# EAGLE board tube-tester.job (EAGLE 6.4)
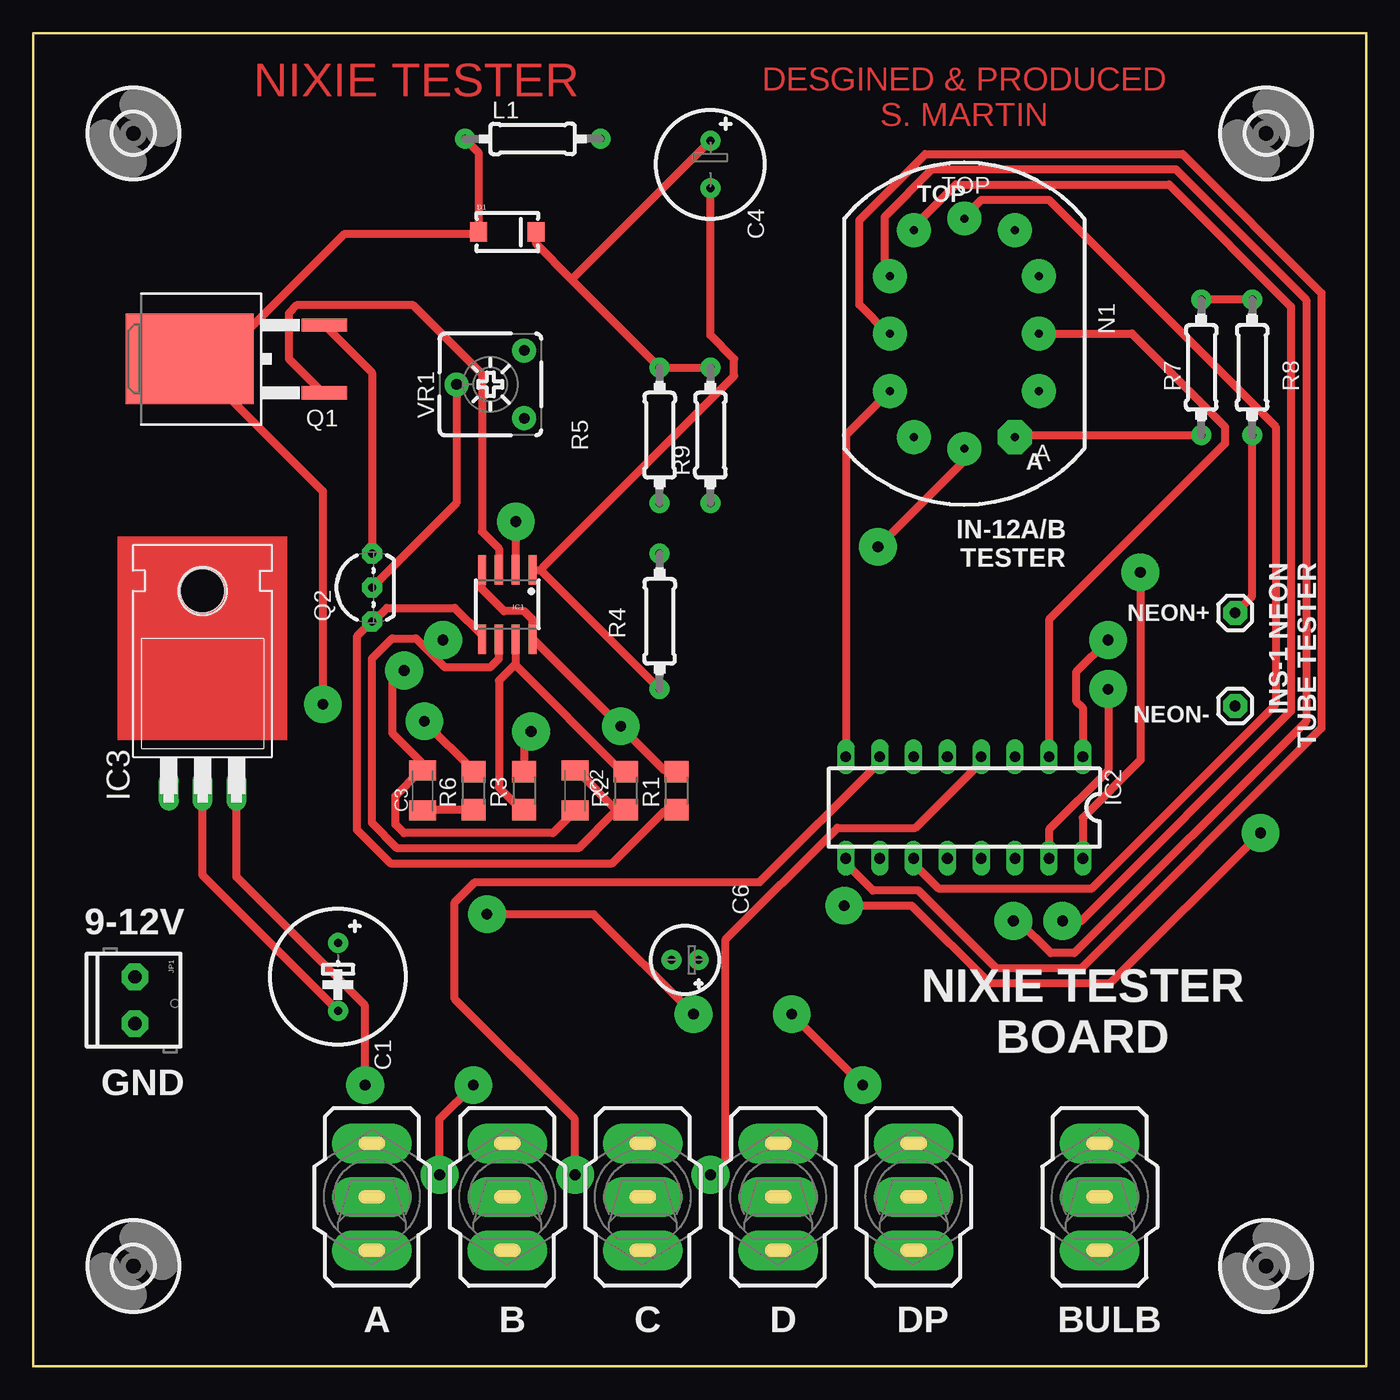
[diagram p0: board, top side]
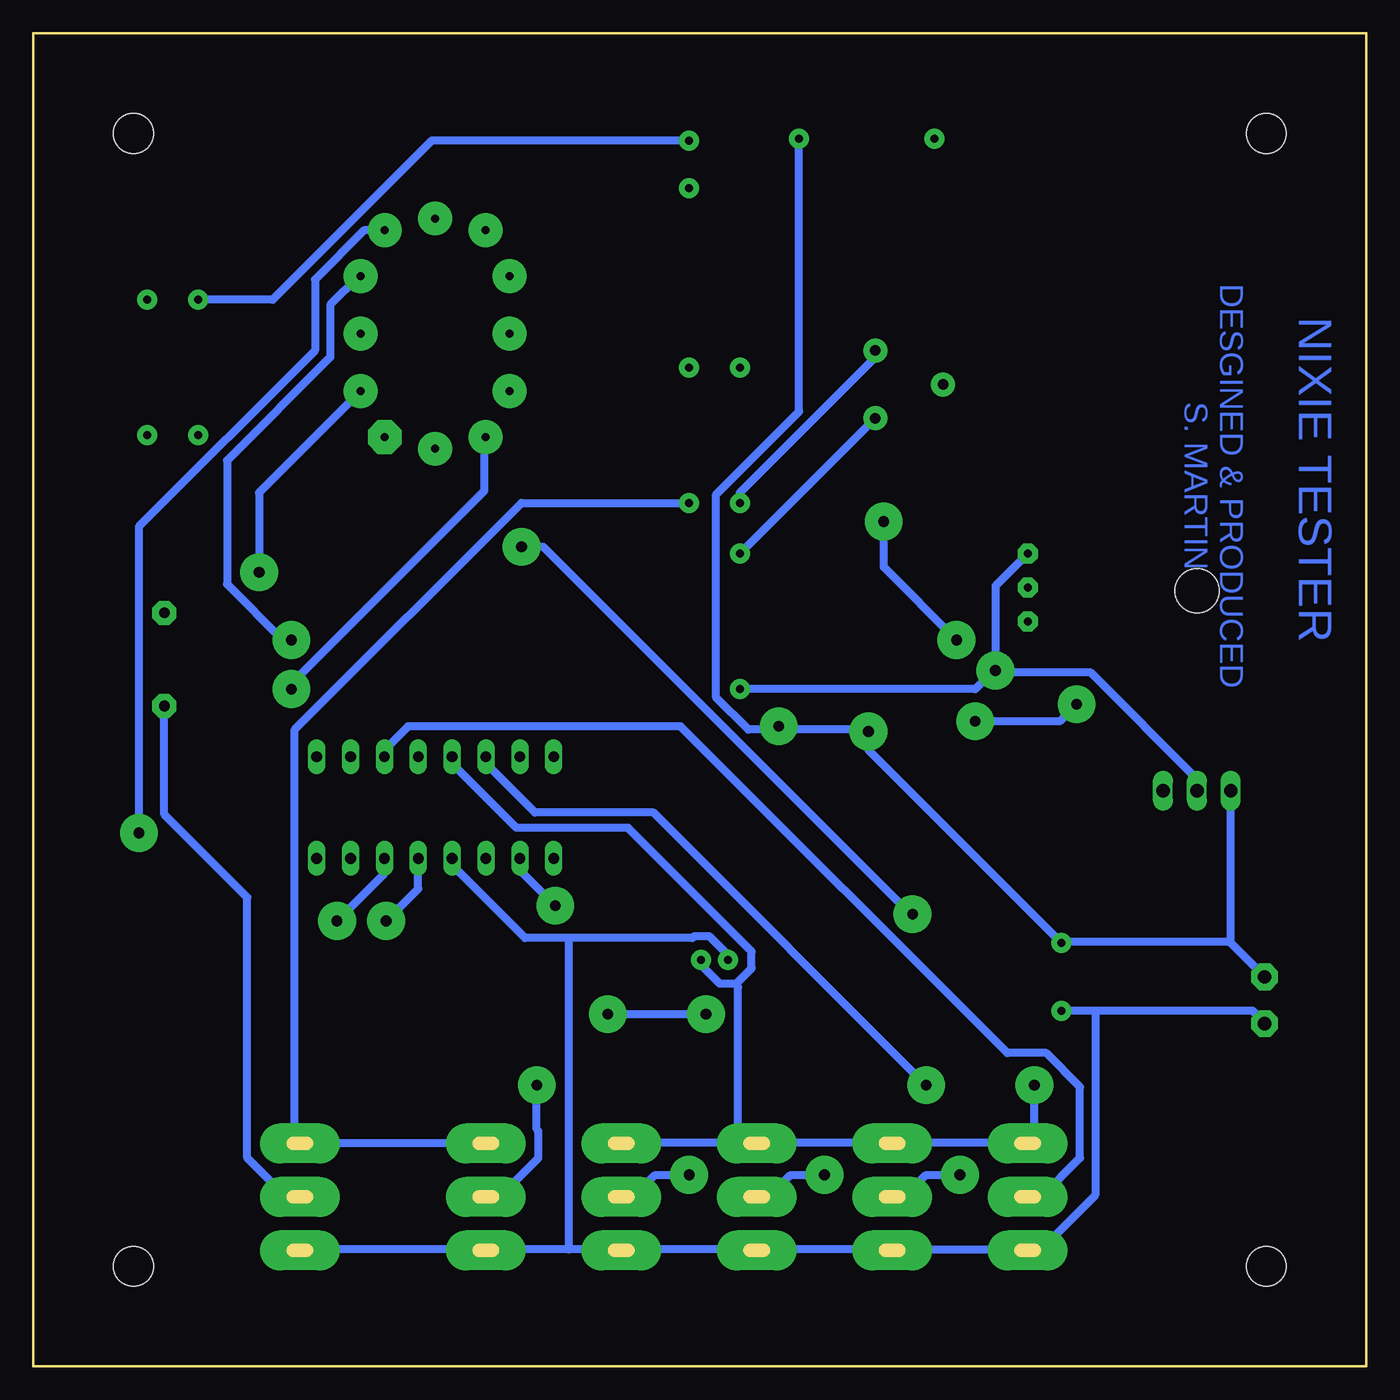
[diagram p1: board, bottom side, seen from below]

Size 100 x 100 mm. Coordinates in mm from the lower left corner, seen from the top.
Outline: 0,0 0,100 100,100 100,0 0,0
Copper layers (1*16): Top 0.035mm / dielectric 1.5mm / Bottom 0.035mm
Design rules "iStivi-0.8mm via-16mil-track *": minimum track width 24mil, minimum drill 0.8mm, track to track 20mil, track to pad 24mil, pad to pad 10mil, via to via 30mil, smd to smd 10mil, copper to edge 40mil, drill to drill 8mil, minimum pad ring 10mil, minimum via ring 40mil, stop-mask expansion 0mil, vias tented up to drill 0mil, thermal gap 12mil
tRestrict: area 6.3,24.1 to 8.9,30.5

## Footprints (pad centres in the part's own frame; a part is rotated, then mirrored left to right if it is on the bottom)
320-916 = drill 0.8 pad 3 long: 1 0,4.013; 2 0,0; 3 0,-4.013
E5-10,5 = drill 0.6 pad 1.5: + -2.54,0; - 2.54,0
C1206K = smd 1.5 x 2: 1 -1.5,0; 2 1.5,0
E3,5-8 = drill 0.6 pad 1.5: + -1.778,0; - 1.778,0
E2-5 = drill 0.6 pad 1.5: + -1.016,0; - 1.016,0
SMA-DIODE = smd 1.27 x 1.47: A -2.15,0; C 2.15,0
SO08 = smd 0.61 x 2.21: 1 -1.905,-2.616; 2 -0.635,-2.616; 3 0.635,-2.616; 4 1.905,-2.616; 5 1.905,2.616; 6 0.635,2.616; 7 -0.635,2.616; 8 -1.905,2.616
DIL16 = drill 0.8 long: 1 -8.89,-3.81; 2 -6.35,-3.81; 3 -3.81,-3.81; 4 -1.27,-3.81; 5 1.27,-3.81; 6 3.81,-3.81; 7 6.35,-3.81; 8 8.89,-3.81; 9 8.89,3.81; 10 6.35,3.81; 11 3.81,3.81; 12 1.27,3.81; 13 -1.27,3.81; 14 -3.81,3.81; 15 -6.35,3.81; 16 -8.89,3.81
TO220H = drill 1 long: 1 -2.54,-10.16; 2 0,-10.16; 3 2.54,-10.16 | hole 3.302: 0,4.826
SCREWTERMINAL-3.5MM-2 = drill 1 pad 2 octagon: 1 0,0; 2 3.5,0
0207/10 = drill 0.6 pad 1.5: 1 -5.08,0; 2 5.08,0
IN-12 = drill 0.6 pad 2.54: 0 5.59,-4.32; 1 -3.78,-7.766; 2 -5.59,-4.32; 3 -5.59,0; 4 -5.59,4.32; 5 -3.78,7.766; 6 0,8.64; 7 3.78,7.766; 8 5.59,4.32; 9 5.59,0; LHDP 0,-8.64 | drill 0.6 pad 2.54 octagon: A 3.78,-7.766
1X01 = drill 0.8 pad 1.8 octagon: 1 0,0
TO263 = smd 1 x 3.4: 1 -2.54,-6.6; 2 2.54,-6.6 | smd 6.8 x 9.6: 3 0,3.5
TO92-EBC = drill 0.6 pad 1.5 octagon: B 0,-1.27; C -2.54,-1.27; E 2.54,-1.27
R1206 = smd 1.6 x 1.803: 1 -1.422,0; 2 1.422,0
3,0 = hole 3: 0,0
CA6V = drill 0.8 pad 1.8: A -2.54,-2.54; E 2.54,-2.54; S 0,2.54

## Placement (x,y rotation side)
A  [320-916]  25.4,12.7 0 top
B  [320-916]  35.56,12.7 0 top
BULB  [320-916]  80.01,12.7 0 top
C  [320-916]  45.72,12.7 0 top
C1  330uF  [E5-10,5]  22.86,29.21 270 top
C2  2n2  [C1206K]  40.64,43.18 270 top
C3  100pF  [C1206K]  29.21,43.18 90 top
C4  2.2uF  [E3,5-8]  50.8,90.17 270 top
C6  10uF  [E2-5]  48.9,30.48 180 top
D  [320-916]  55.88,12.7 0 top
D1  1N4007  [SMA-DIODE]  35.56,85.09 0 top
DP  [320-916]  66.04,12.7 0 top
IC1  NE555D  [SO08]  35.56,57.15 180 top
IC2  74141N  [DIL16]  69.85,41.91 180 top
IC3  7805  [TO220H]  12.7,53.34 0 top
JP1  [SCREWTERMINAL-3.5MM-2]  7.62,29.21 270 top
L1  100uH  [0207/10]  37.47,92.08 0 top
N1  IN-12B  [IN-12]  69.85,77.47 0 top
NEON+  M01PTH  [1X01]  90.17,56.52 0 top
NEON-  M01PTH  [1X01]  90.17,49.53 0 top
Q1  IRF740S  [TO263]  15.24,75.56 90 top
Q2  BC546  [TO92-EBC]  24.13,58.42 90 top
R1  56K  [R1206]  48.26,43.18 90 top
R2  10K  [R1206]  44.45,43.18 90 top
R3  1K  [R1206]  36.83,43.18 90 top
R4  470R  [0207/10]  46.99,55.88 90 top
R5  220K  [0207/10]  46.99,69.85 90 top
R6  2K2  [R1206]  33.02,43.18 90 top
R7  22K  [0207/10]  87.63,74.93 90 top
R8  22K  [0207/10]  91.44,74.93 90 top
R9  22K  [0207/10]  50.8,69.85 90 top
U$1  [3,0]  7.5,7.5 0 top
U$2  [3,0]  92.5,7.5 0 top
U$3  [3,0]  92.5,92.5 0 top
U$4  [3,0]  7.5,92.5 0 top
VR1  1K  [CA6V]  34.29,73.66 90 top

## Library data of the parts
A B BULB C D DP = iStivi - Button-Switch
C1-C4 C6 D1 L1 R1-R9 VR1 = iStivi - RCLD
IC1 IC2 = iStivi - ICs
IC3 Q2 = iStivi - Transistor-FET-reg
JP1 NEON+ NEON- = iStivi - Header-Connector
N1 = iStivi - Tubes
Q1 = iStivi - Transistor-FET
U$1-U$4 = iStivi - Board-Holes

## Nets
GND: A.3 B.3 BULB.3 C1.- C2.2 C3.2 C4.- C6.- C.3 D.3 DP.3 IC1.1 IC2.12 IC3.2 JP1.2 Q1.2 Q2.E R4.1
N$1: IC1.3 Q1.1
N$2: C3.1 R6.1
N$3: IC1.5 Q2.C R1.1
N$4: IC1.7 R2.2 R3.1
N$5: C2.1 IC1.2 IC1.6 R2.1
N$6: D1.A L1.1 Q1.3 R6.2
N$7: C4.+ D1.C R5.2 R7.2 R8.2 R9.2
N$8: R5.1 VR1.E
N$9: R4.2 VR1.A
N$10: Q2.B VR1.S
N$11: IC2.15 N1.1
N$12: IC2.8 N1.2
N$13: IC2.9 N1.3
N$14: IC2.13 N1.4
N$15: IC2.14 N1.5
N$16: IC2.11 N1.6
N$17: IC2.10 N1.7
N$18: IC2.1 N1.8
N$19: IC2.2 N1.9
N$20: IC2.16 N1.0
N$21: N1.A R7.1
N$22: A.2 IC2.3
N$23: B.2 IC2.6
N$24: C.2 IC2.7
N$25: D.2 IC2.4
N$26: C1.+ IC1.4 IC1.8 IC3.1 JP1.1 L1.2 R1.2 R3.2
N$27: NEON+.1 R8.1
N$28: BULB.2 NEON-.1
N$29: A.1 B.1 C6.+ C.1 D.1 IC2.5 IC3.3
N$30: DP.2 N1.LHDP
N$32: BULB.1 DP.1 R9.1

## Tracks (layer width: path | path; a pad name or v marks a point on that pad's centre or on a via)
GND  (via drill 0.8)
  Top 0.61: 38.1,59.69 37.47,59.69 IC1.1 | R4.1 38.1,59.69 | C4.- 50.8,77.34 52.58,75.56 52.58,74.3 38.23,59.94 38.1,59.69 | IC3.2 12.7,36.83 C1.- | C2.2 40.64,41.66 38.99,40.01 27.81,40.01 27.18,40.64 27.18,42.8 28.96,44.58 29.21,44.58 C3.2 29.08,44.96 29.08,45.34 26.92,47.5 26.92,51.31 v27.81,52.2 | Q2.E 25.4,74.55 Q1.2
  Bottom 0.61: IC2.12 68.58,37.59 63.12,32.13 59.82,32.13 | 59.82,32.13 50.55,32.13 50.42,32.26 49.28,32.26 47.88,30.86 C6.- | 59.82,8.76 56.13,8.76 D.3 55.88,8.76 45.97,8.76 C.3 45.72,8.76 35.81,8.76 B.3 35.56,8.76 25.4,8.76 A.3 25.15,8.89 24.26,8.89 20.32,12.83 20.32,26.67 | 59.82,8.76 66.04,8.76 DP.3 66.29,8.76 80.01,8.76 BULB.3 | 59.82,8.76 59.82,32.13 | 20.32,26.67 8.51,26.67 7.62,25.78 JP1.2 | 20.32,26.67 C1.- | v27.81,52.2 27.81,58.55 Q2.E | IC3.2 12.7,44.07 20.7,52.07 27.56,52.07 v27.81,52.2 | R4.1 29.34,50.8 28.07,52.07 v27.81,52.2
N$1
  Top 0.61: IC1.3 34.92,61.34 33.66,62.61 33.66,74.42 28.45,79.63 19.81,79.63 19.18,78.99 19.18,75.56 21.72,73.03 Q1.1
N$2
  Top 0.61: R6.1 33.02,41.78 29.21,41.78 C3.1
N$3
  Top 0.61: R1.1 48.26,41.66 47.37,41.66 43.43,37.72 26.8,37.72 24.26,40.26 24.26,54.74 Q2.C 25.65,56.01 26.54,56.9 31.62,56.9 33.66,54.86 IC1.5
N$4
  Top 0.61: 36.13,52.64 36.2,52.7 IC1.7 | 36.13,52.64 34.92,51.44 34.92,43.43 36.58,41.78 36.83,41.78 R3.1 | 36.13,52.64 44.07,44.7 44.45,44.7 R2.2
N$5  (via drill 0.8)
  Top 0.61: C2.1 40.64,44.58 40.89,44.58 43.69,41.78 44.45,41.78 R2.1 43.56,41.53 40.89,38.86 27.3,38.86 25.4,40.77 25.4,53.09 26.92,54.61 28.7,54.61 29.78,53.53 | IC1.6 34.92,53.09 34.29,52.45 30.86,52.45 29.78,53.53 | v36.2,63.37 IC1.2 | 29.78,53.53 v30.73,54.48
  Bottom 0.61: v36.2,63.37 36.2,59.94 v30.73,54.48
N$6  (via drill 0.8)
  Top 0.61: L1.1 33.4,91.06 D1.A 33.15,84.96 23.37,84.96 13.08,74.68 Q1.3 11.81,75.56 21.72,65.66 v21.72,49.66 | v29.34,48.39 33.02,44.7 R6.2
  Bottom 0.61: v29.34,48.39 22.99,48.39 v21.72,49.66
N$7
  Top 0.61: R8.2 R7.2 | 40.39,81.53 R5.2 R9.2 | 40.39,81.53 37.72,84.2 D1.C | 40.39,81.53 C4.+
  Bottom 0.61: R7.2 82.04,80.01 70.1,91.95 C4.+
N$8
  Bottom 0.61: R5.1 46.99,65.53 36.83,75.69 VR1.E
N$9
  Bottom 0.61: VR1.A R4.2
N$10
  Top 0.61: Q2.B 31.75,64.77 VR1.S
N$11  (via drill 0.8)
  Top 0.61: IC2.15 76.2,40.26 80.64,44.7 v80.64,50.8
  Bottom 0.61: v80.64,50.8 80.64,51.18 66.17,65.66 66.17,69.6 N1.1
N$12
  Top 0.61: IC2.8 60.96,69.85 N1.2
N$13
  Top 0.61: IC2.9 60.96,37.72 62.99,35.69 66.42,35.69 72.26,29.84 78.61,29.84 96.65,47.88 96.65,80.52 86.23,90.93 66.93,90.93 61.98,85.98 61.98,79.63 64.14,77.47 N1.3
N$14  (via drill 0.8)
  Top 0.61: v73.53,33.4 73.91,33.4 76.33,30.99 78.11,30.99 95.5,48.39 95.5,80.01 85.72,89.79 67.44,89.79 63.88,86.23 63.88,82.17 N1.4
  Bottom 0.61: IC2.13 71.12,35.81 v73.53,33.4
N$15  (via drill 0.8)
  Top 0.61: v77.22,33.4 78.61,33.4 94.36,49.15 94.36,79.5 85.22,88.65 69.22,88.65 66.17,85.6 66.17,85.34 N1.5
  Bottom 0.61: IC2.14 73.66,36.96 v77.22,33.4
N$16
  Top 0.61: IC2.11 66.04,37.72 67.94,35.81 79.38,35.81 93.22,49.66 93.22,70.48 76.2,87.5 71.12,87.5 69.85,86.23 N1.6
N$17  (via drill 0.8)
  Top 0.61: v60.83,34.54 65.91,34.54 71.75,28.7 80.77,28.7 v92.08,40.01
  Bottom 0.61: IC2.10 63.5,37.21 v60.83,34.54 | v92.08,40.01 92.08,62.99 78.87,76.2 78.87,81.53 75.18,85.22 73.66,85.22 N1.7
N$18  (via drill 0.8)
  Top 0.61: IC2.1 78.74,49.4 78.23,49.91 78.23,52.07 v80.64,54.48
  Bottom 0.61: v80.64,54.48 81.28,54.48 85.47,58.67 85.47,67.94 77.72,75.69 77.72,79.63 75.56,81.79 N1.8
N$19
  Top 0.61: IC2.2 76.2,56.01 89.41,69.22 89.41,70.48 82.42,77.47 N1.9
N$20  (via drill 0.8)
  Top 0.61: IC2.16 78.74,41.15 83.06,45.47 v83.06,59.56
  Bottom 0.61: v83.06,59.56 83.06,65.53 N1.0
N$21
  Top 0.61: R7.1 73.79,69.85 73.66,69.72 N1.A
N$22
  Bottom 0.61: IC2.3 73.66,46.23 71.88,48.01 51.44,48.01 26.92,23.5 24,23.5 21.46,20.95 21.46,15.62 24.38,12.7 A.2
N$23  (via drill 0.8)
  Top 0.61: v33.02,21.08 30.48,18.54 v30.48,14.35
  Bottom 0.61: IC2.6 66.04,45.21 62.36,41.53 53.47,41.53 v33.02,21.08 | v30.48,14.35 33.02,14.35 34.67,12.7 B.2
N$24  (via drill 0.8)
  Top 0.61: IC2.7 63.5,45.34 54.48,36.32 33.15,36.32 31.62,34.8 31.62,27.56 40.64,18.54 v40.64,14.35
  Bottom 0.61: v40.64,14.35 43.18,14.35 44.83,12.7 C.2
N$25  (via drill 0.8)
  Top 0.61: IC2.4 71.12,45.34 66.17,40.39 60.33,40.39 51.94,32 51.94,15.49 v50.8,14.35
  Bottom 0.61: v50.8,14.35 53.34,14.35 54.99,12.7 D.2
N$26  (via drill 0.8)
  Top 0.61: R1.2 48.26,44.7 47.37,44.7 v44.07,48.01 37.47,54.61 IC1.8 37.47,56.01 36.83,56.64 35.31,56.64 33.66,58.29 IC1.4 | R3.2 36.83,47.12 v37.34,47.62
  Bottom 0.61: 10.16,31.88 10.16,31.75 JP1.1 | 10.16,31.88 IC3.1 | L1.2 42.55,71.63 48.77,65.41 48.77,50.16 46.35,47.75 44.07,47.75 | 44.07,47.75 37.59,47.75 v37.34,47.62 37.34,46.23 C1.+ 22.61,31.88 10.16,31.88 | v44.07,48.01 44.07,47.75
N$27
  Top 0.61: R8.1 91.44,57.78 NEON+.1
N$28
  Bottom 0.61: NEON-.1 90.17,41.4 83.95,35.18 83.95,15.62 81.03,12.7 BULB.2
N$29  (via drill 0.8)
  Top 0.61: IC3.3 15.24,36.7 24.89,27.05 v24.89,21.08
  Bottom 0.61: IC2.5 68.58,45.21 63.75,40.39 55.37,40.39 46.1,31.11 46.1,29.84 47.24,28.7 | 47.24,28.7 48.51,28.7 49.91,30.1 C6.+ | v24.89,21.08 24.89,17.27 25.4,16.76 A.1 25.65,16.76 35.56,16.76 B.1 35.81,16.76 45.72,16.76 C.1 | D.1 55.88,16.76 45.97,16.76 C.1 | 47.24,28.7 47.12,28.45 47.12,17.02 C.1
N$30  (via drill 0.8)
  Top 0.61: N1.LHDP 69.85,67.94 v63.37,61.47 | v34.04,33.91 42.04,33.91 v49.53,26.42 | v62.23,21.08 v56.9,26.42
  Bottom 0.61: v63.37,61.47 61.72,61.47 34.16,33.91 v34.04,33.91 | v56.9,26.42 v49.53,26.42 | v62.23,21.08 62.23,17.78 62.1,17.65 62.1,15.62 65.02,12.7 DP.2
N$32
  Bottom 0.61: R9.1 63.37,64.77 80.39,47.75 80.39,17.14 80.01,16.76 BULB.1 79.76,16.76 66.04,16.76 DP.1
(copper drawn outside any net)
  shapes: Top area x1

## Text on the board
Top: NIXIE TESTER | DESGINED & PRODUCED / S. MARTIN
Bottom: NIXIE TESTER | DESGINED & PRODUCED / S. MARTIN
tSilk: IN-12A/B / TESTER | INS-1 NEON / TUBE TESTER | 9-12V | GND
_tplace: TOP | A | NIXIE TESTER / BOARD
_tValues: 2.2uF | 220K | 22K | 22K | 470R | M01PTH | 330uF | 100uF | M01PTH | 10uF